# Altium PCB HAB_V01R01.PcbDoc (part 2 of 3)
Units mil, origin at the board's own origin, x right, y up, seen from the top; angles counter-clockwise.
Board outline 3149.61 x 1574.8 mil, 4 copper layers ([L1] Top Layer, [L2] GND, [L3] PWR, [L4] Bottom Layer), stack 61.811 mil thick; 74 components, 79 nets, 377 pads, 164 vias.
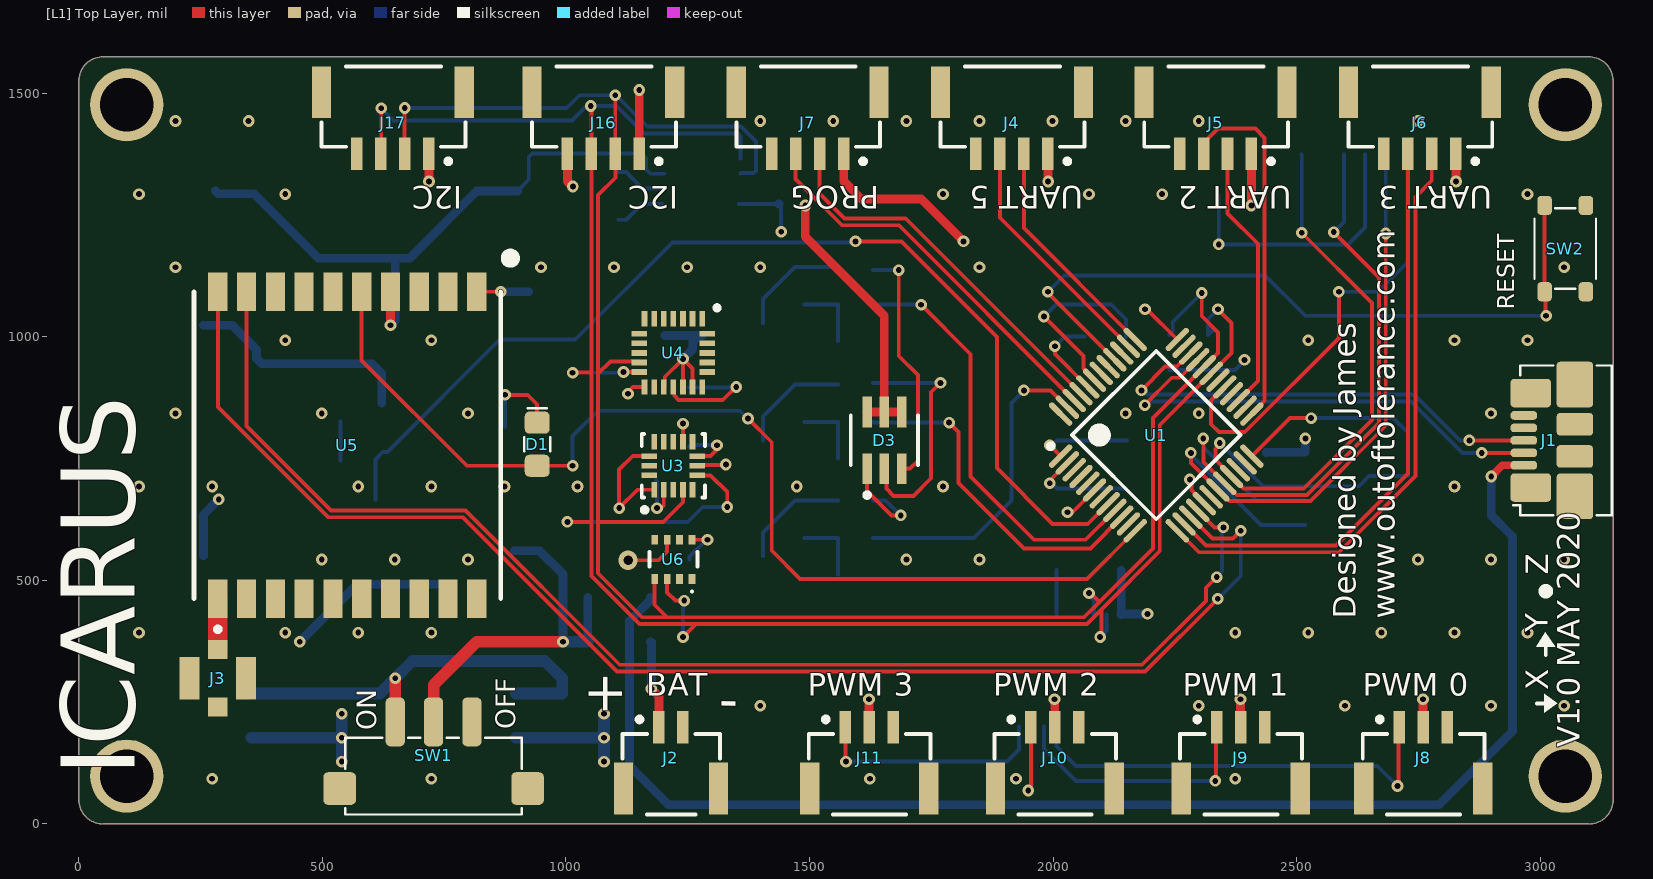
[diagram p0: [L1] Top Layer view]

## Part data (continued)
SW3: "SWITCH SLIDE SPDT 100MA 6V", Current Rating=100mA, Manufacturer="Nidec Copal", Max Operating Temperature=85°C, Max Voltage Rating (DC)=24V, Min Operating Temperature=-40°C, Supplier Part Number 1=563-1022-1-ND, Voltage Rating (DC)=6V, Body Material=Polyphenylene, ComponentLink1Description=https://datasheet.ciiva.com/2865/cjs-2865057.pdf, ComponentLink1URL=https://datasheet.ciiva.com/2865/cjs-2865057.pdf, ComponentLink2Description=https://datasheet.ciiva.com/2865/cjs-2865058.pdf, ComponentLink2URL=https://datasheet.ciiva.com/2865/cjs-2865058.pdf, ComponentLink3Description=https://datasheet.ciiva.com/2865/cjs-2865059.pdf, ComponentLink3URL=https://datasheet.ciiva.com/2865/cjs-2865059.pdf, Contact Material="Copper Alloy", Contact Plating=Gold, Electrical Life=200Cycles, Lead Free="Lead Free", Length=0.212inch, Manufacturer Part Number=CJS-1200TB, Mount="Surface Mount", Number of Positions=2, Orientation=Vertical, Packaging="Tape and Reel", Radiation Hardening=No, Stock 1=0, Supplier 1=Digi-Key, Termination="Gull Wing", Throw Configuration=SPDT, Washable=Yes
U1: library part CMP-2100-03585-1, "SMART ARM-Based Microcontroller, 1.62 to 3.63 V, 256 KB Flash, 32 KB SRAM, -40 to 85 degC, 48-Pin TQFP, RoHS, Tray", Case/Package=TQFP, Frequency=48MHz, Manufacturer=Atmel, Max Operating Temperature=85degC, Max Supply Voltage=3.63V, Min Operating Temperature=-40degC, Min Supply Voltage=1.62V, Package Description="48-Pin Thin Profile Plastic Quad Flat Package, Body 7 x 7 mm, Pitch 0.5 mm", Package Reference=TQFP48, Contact Plating=Tin, Datasheet URL=http://www.atmel.com/images/atmel-42181-sam-d21_datasheet.pdf, Datasheet Version="Rev. N, 10/2016", Lead Free=LeadFree, Manufacturer URL=http://www.atmel.com/, Max Frequency=48MHz, Mount=SurfaceMount, Number of Pins=48, Number of Timers/Counters=6, Packaging=Tray, REACH SVHC=NoSVHC, RoHSCompliant=true
U2: library part CMP-10083-000004-1, "IC RTC CLK/CALENDAR I2C 8-HVSON", Ambient Temperature Range High=+85°C, Ambient Temperature Range Low=-40°C, Manufacturer="NXP Semiconductors", Max Supply Voltage=5.5V, Min Supply Voltage=1V, Nominal Supply Current=0.15-1.2uA, Package=SOT909-1, Temperature="-40°C to +85°C", Automotive=No, Category=IC, ComponentLink2Description=Datasheet, ComponentLink2URL=https://www.nxp.com/docs/en/data-sheet/PCF8523.pdf, Device Class L1="Integrated Circuits (ICs)", Device Class L2="Clock and Timing", Device Class L3="Real Time Clocks", Digikey Description="IC RTC CLK/CALENDAR I2C 8-HVSON", Footprint Url=https://www.nxp.com/docs/en/package-information/SOT909-1.pdf, Height=1mm, Interface=I2C, Ipc Land Pattern Name=DFN400X400X100-8, Lead Free=Yes, Manufacturer Part Number=PCF8523TK/1,118, Mouser Description="Real Time Clock REAL-TIME CLOCK (RTC) AND CALENDAR", Number of Outputs=1, Octopart=https://octopart.com/pcf8523tk%2F1%2C118-nxp+semiconductors-19647992, RoHS=TRUE, Standoff Height=0mm, Temperature Range High=+85°C, Temperature Range Low=-40°C
U3: library part CMP-2000-05129-1, "6-Axis Xtrinsic Sensor with Integrated Linear Accelerometer and Magnetometer, 1.95 to 3.6 V, -40 to 85 degC, 16-Pin QFN, RoHS, Tape and Reel", Manufacturer=Freescale, Maximum Operating Temperature=+85C, Minimum Operating Temperature=-40C, Operating Supply Voltage=1.95Vto3.6V, Package / Case=QFN-16, Package Description="16-Pin Quad Flat No-lead Package, Body 3 x 3 mm, Pitch 0.5 mm", Supply Voltage - Max=3.6V, Supply Voltage - Min=1.95V, Brand=FreescaleSemiconductor, Datasheet URL=https://datasheet.ciiva.com/12175/fxos8700cq-60595-12175213.pdf, Datasheet Version="Rev. 1, 06/2012", Factory Pack Quantity=1000, Manufacturer URL=http://www.nxp.com/, Mounting Style=SMD/SMT, Output Type=Digital, Package Reference=QFN-16, Packaging=Reel, Product Category=BoardMountAccelerationSensors, RoHS=Details, Sensing Axis=X,Y,Z, Tradename=Xtrinsic, Type=6AxisSensor, Unit Weight=0.000808oz
U4: "NXP Precision 3 Axis Gyro I2C", Supplier Part Number 1=FXAS21002CQR1CT-ND, Supplier 1=Digi-Key
U5: "Ultimate GPS Module 66 channel 10 Hz"
U6: library part CMP-2000-05073-1, "Combined Humidity and Pressure Sensor, 1.71 to 3.6 V, -40 to 85 degC, 8-Pin SMD, RoHS, Tape and Reel", Manufacturer="Bosch Sensortec", Datasheet URL=http://datasheet.octopart.com/BME280-Bosch-datasheet-58577763.pdf, Datasheet Version="Rev. 1.2, 10/2015", Manufacturer URL=http://www.bosch-sensortec.com
U7: "IC REG LINEAR 3.3V 1A SOT223", Case/Package=SOT-223, Dropout Voltage=1.07V, Input Bias Current=6mA, Manufacturer="ON Semiconductor", Max Input Voltage=20V, Max Operating Temperature=125°C, Max Output Current=1A, Max Output Voltage=3.3V, Max Supply Voltage=15V, Min Input Voltage=3.5V, Min Operating Temperature=0°C, Min Supply Voltage=4.75V, Output Voltage Accuracy=1%, Package Quantity=1, Quiescent Current=10mA, Reference Voltage=1.25V, Supplier Part Number 1=NCP1117ST33T3GOSCT-ND, Accuracy=1%, ComponentLink1Description=https://datasheet.ciiva.com/3224/ncp1117-d-3224144.pdf?src-supplier=Avnet, ComponentLink1URL=https://datasheet.ciiva.com/3224/ncp1117-d-3224144.pdf?src-supplier=Avnet, ComponentLink2Description=https://datasheet.ciiva.com/22697/1726422-22697602.pdf?src-supplier=Element14, ComponentLink2URL=https://datasheet.ciiva.com/22697/1726422-22697602.pdf?src-supplier=Element14, ComponentLink3Description=https://datasheet.ciiva.com/15111/getdatasheetpartid-82718-15111483.pdf?src-supplier=Verical, ComponentLink3URL=https://datasheet.ciiva.com/15111/getdatasheetpartid-82718-15111483.pdf?src-supplier=Verical, ComponentLink4Description=https://datasheet.ciiva.com/8233/ncp1117-d-8233589.pdf?src-supplier=Avnet, ComponentLink4URL=https://datasheet.ciiva.com/8233/ncp1117-d-8233589.pdf?src-supplier=Avnet, ComponentLink5Description=https://datasheet.ciiva.com/2042/ncp1117-d-2042027.pdf?src-supplier=Digi-Key, ComponentLink5URL=https://datasheet.ciiva.com/2042/ncp1117-d-2042027.pdf?src-supplier=Digi-Key, ComponentLink6Description=https://datasheet.ciiva.com/2042/ncp1117-d-2042028.pdf?src-supplier=Digi-Key, ComponentLink6URL=https://datasheet.ciiva.com/2042/ncp1117-d-2042028.pdf?src-supplier=Digi-Key, ComponentLink7Description=https://datasheet.ciiva.com/2042/ncp1117-d-2042029.pdf?src-supplier=Digi-Key, ComponentLink7URL=https://datasheet.ciiva.com/2042/ncp1117-d-2042029.pdf?src-supplier=Digi-Key, ComponentLink8Description=https://datasheet.ciiva.com/8073/1726422-8073735.pdf?src-supplier=Element14, ComponentLink8URL=https://datasheet.ciiva.com/8073/1726422-8073735.pdf?src-supplier=Element14, ComponentLink9Description=https://datasheet.ciiva.com/28483/1748260-28483307.pdf?src-supplier=Element14, ComponentLink9URL=https://datasheet.ciiva.com/28483/1748260-28483307.pdf?src-supplier=Element14, ComponentLink10Description=https://datasheet.ciiva.com/16382/ncp1117-d-16382636.pdf?src-supplier=Future+Electronics, ComponentLink10URL=https://datasheet.ciiva.com/16382/ncp1117-d-16382636.pdf?src-supplier=Future+Electronics, Contact Plating=Tin, Halogen Free="Halogen Free", Height=1.69mm, Lead Free="Lead Free", Length=6.7mm, Manufacturer Part Number=NCP1117ST33T3G, Min Current Limit=1A, Min Output Voltage=3.3V, Mount="Surface Mount", Nominal Output Voltage=3.3V, Number of Outputs=1, Number of Pins=3, Number of Regulators=1, Output Current=1A, Output Type=Fixed, Output Voltage=3.3V, Packaging="Tape and Reel", Polarity=Positive, Pricing 1="1 = 0.52000, 10 = 0.44400, 100 = 0.33150, 500 = 0.26048, 1000 = 0.20129 (USD)", Radiation Hardening=No, REACH SVHC="No SVHC", RoHS=Yes, Stock 1=60671, Supplier 1=Digi-Key, Termination=SMD/SMT, Width=3.7mm
U8: "IC REG LINEAR 5V 1A SOT223", Case/Package=SOT-223, Dropout Voltage=1.2V, Input Bias Current=6mA, Manufacturer="ON Semiconductor", Max Input Voltage=20V, Max Operating Temperature=125°C, Max Output Current=1A, Min Input Voltage=3.5V, Min Operating Temperature=0°C, Nominal Output Voltage=5V, Output Voltage Accuracy=1%, Package Quantity=1, Power Rating=781mW, Quiescent Current=10mA, Supplier Part Number 1=NCP1117ST50T3GOSCT-ND, Accuracy=1%, ComponentLink1Description=https://datasheet.ciiva.com/28483/1748260-28483320.pdf?src-supplier=Element14, ComponentLink1URL=https://datasheet.ciiva.com/28483/1748260-28483320.pdf?src-supplier=Element14, ComponentLink2Description=https://datasheet.ciiva.com/2042/ncp1117-d-2042018.pdf?src-supplier=Digi-Key, ComponentLink2URL=https://datasheet.ciiva.com/2042/ncp1117-d-2042018.pdf?src-supplier=Digi-Key, ComponentLink3Description=https://datasheet.ciiva.com/2042/ncp1117-d-2042019.pdf?src-supplier=Digi-Key, ComponentLink3URL=https://datasheet.ciiva.com/2042/ncp1117-d-2042019.pdf?src-supplier=Digi-Key, ComponentLink4Description=https://datasheet.ciiva.com/2042/ncp1117-d-2042020.pdf?src-supplier=Digi-Key, ComponentLink4URL=https://datasheet.ciiva.com/2042/ncp1117-d-2042020.pdf?src-supplier=Digi-Key, ComponentLink5Description=https://datasheet.ciiva.com/25978/ncp1117-d-25978293.pdf?src-supplier=Avnet+Europe, ComponentLink5URL=https://datasheet.ciiva.com/25978/ncp1117-d-25978293.pdf?src-supplier=Avnet+Europe, ComponentLink6Description=https://datasheet.ciiva.com/16491/ncp1117-d-16491895.pdf?src-supplier=Avnet+Asia, ComponentLink6URL=https://datasheet.ciiva.com/16491/ncp1117-d-16491895.pdf?src-supplier=Avnet+Asia, ComponentLink7Description=https://datasheet.ciiva.com/8073/ncp1117-d-8073736.pdf?src-supplier=Element14, ComponentLink7URL=https://datasheet.ciiva.com/8073/ncp1117-d-8073736.pdf?src-supplier=Element14, ComponentLink8Description=https://datasheet.ciiva.com/8233/ncp1117-d-8233593.pdf?src-supplier=Avnet, ComponentLink8URL=https://datasheet.ciiva.com/8233/ncp1117-d-8233593.pdf?src-supplier=Avnet, ComponentLink9Description=https://datasheet.ciiva.com/16209/ncp1117-d-16209561.pdf?src-supplier=Future+Electronics, ComponentLink9URL=https://datasheet.ciiva.com/16209/ncp1117-d-16209561.pdf?src-supplier=Future+Electronics, ComponentLink10Description=https://datasheet.ciiva.com/8231/ncp1117-d-8231068.pdf?src-supplier=Avnet, ComponentLink10URL=https://datasheet.ciiva.com/8231/ncp1117-d-8231068.pdf?src-supplier=Avnet, ComponentLink11Description=https://datasheet.ciiva.com/8073/ncp1117-d-8073902.pdf?src-supplier=Element14, ComponentLink11URL=https://datasheet.ciiva.com/8073/ncp1117-d-8073902.pdf?src-supplier=Element14, Contact Plating=Tin, Halogen Free="Halogen Free", Height=1.69mm, Lead Free="Lead Free", Length=6.7mm, Manufacturer Part Number=NCP1117ST50T3G, Min Current Limit=1A, Number of Outputs=1, Number of Pins=4, Number of Regulators=1, Output Current=1A, Output Type=Fixed, Output Voltage=5V, Packaging="Tape and Reel", Polarity=Positive, Pricing 1="1 = 0.54000, 10 = 0.45800, 100 = 0.34230, 500 = 0.26896, 1000 = 0.20783 (USD)", Radiation Hardening=No, REACH SVHC="No SVHC", RoHS=Yes, Stock 1=20727, Supplier 1=Digi-Key, Tolerance=1%, Width=3.7mm
U9: library part CMP-10140-000001-1, "IC LED DRIVER RGBA 28-TSSOP", Ambient Temperature Range High=+85°C, Ambient Temperature Range Low=-40°C, Manufacturer="NXP Semiconductors", Max Power Dissipation=400mW, Max Supply Voltage=5.5V, Min Supply Voltage=2.3V, Nominal Supply Current=6mA, Output Current=25mA, Output Voltage=5V, Package=SOT361-1, Temperature="-40°C to +85°C", Automotive=No, Category=IC, Ciiva Ids=1426473, ComponentLink2Description=Datasheet, ComponentLink2URL=https://www.nxp.com/docs/en/data-sheet/PCA9685.pdf, Device Class L1="Integrated Circuits (ICs)", Device Class L2="Power Management ICs", Device Class L3="LED Drivers", Digikey Description="IC LED DRIVER RGBA 28-TSSOP", Dimming=I2C,PWM, Footprint Url=https://www.nxp.com/docs/en/package-information/SOT361-1.pdf, Height=1.1mm, Import Ts=1521846855, Lead Free=Yes, Manufacturer Part Number=PCA9685PW,118, Mouser Description="LED Display Drivers I2C Bus LED Controller 28-Pin", Number of Outputs=16, Octopart=https://octopart.com/pca9685pw%2C118-nxp+semiconductors-11853435, Release Date=1454319143, RoHS=TRUE, Standoff Height=0.05mm, Temperature Range High=+85°C, Temperature Range Low=-40°C
U10: library part CMP-12945-000012-1, "IC FRAM 256K SPI 20MHZ 8SOIC", Ambient Temperature Range High=+85°C, Ambient Temperature Range Low=-40°C, Frequency=20MHz, Manufacturer="Cypress Semiconductor", Max Supply Voltage=5.5V, Min Supply Voltage=2.7V, Nominal Supply Current=0.25-2mA, Package=51-85066, Temperature="-40°C to +85°C", Automotive=No, Category=IC, ComponentLink2Description=Datasheet, ComponentLink2URL=https://www.cypress.com/file/41696/download, Device Class L1="Integrated Circuits (ICs)", Device Class L2=Memory, Device Class L3=unset, Digikey Description="IC FRAM 256K SPI 20MHZ 8SOIC", Footprint Url=https://www.cypress.com/file/42881/download, Height=1.727mm, Interface=SPI, Ipc Land Pattern Name=SOIC127P602X164-8, Lead Free=Yes, Manufacturer Part Number=FM25W256-GTR, Memory Size=256Kbits, Memory Type=OTHER, Mouser Description="F-RAM SPI FRAM 256k 3-5V", Octopart=https://octopart.com/fm25w256-gtr-cypress+semiconductor-25384375, RoHS=TRUE, Standoff Height=0.1mm, Temperature Range High=+85°C, Temperature Range Low=-40°C